# Altium PCB PCB.PcbDoc
Units mm, origin at the board's own origin, x right, y up, seen from the top; angles counter-clockwise.
Board outline 44 x 76 mm, 2 copper layers (Top Layer, Bottom Layer); 18 components, 26 nets, 115 pads, 20 vias.
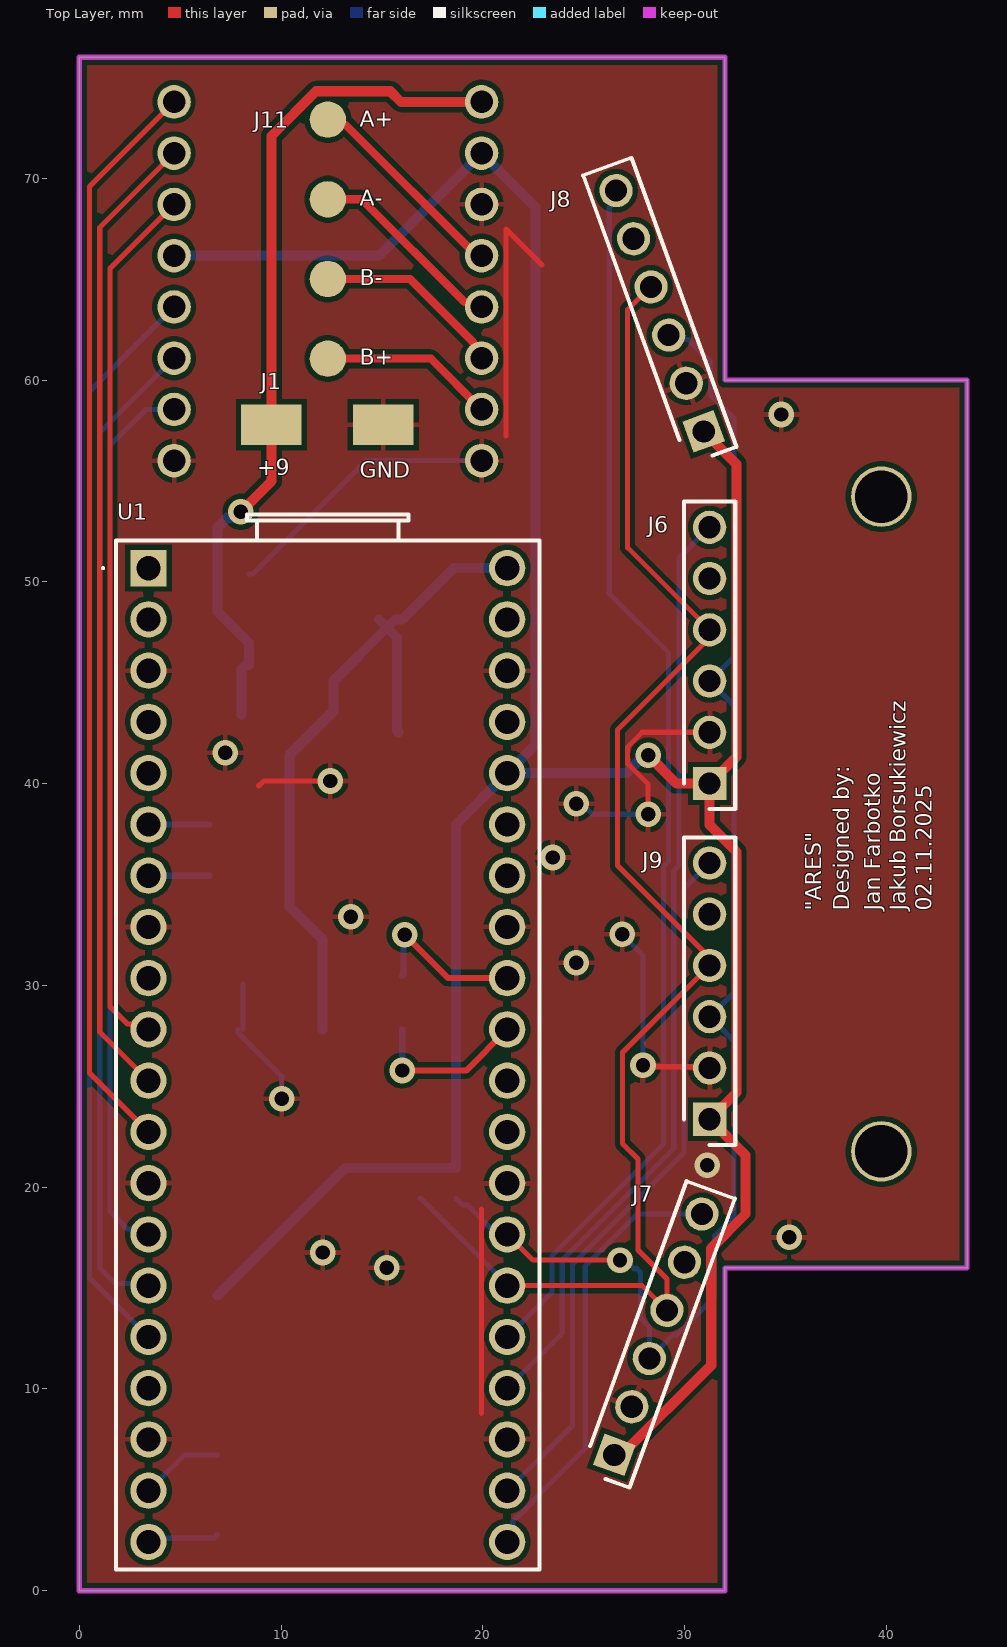
[diagram p0: Top Layer view]
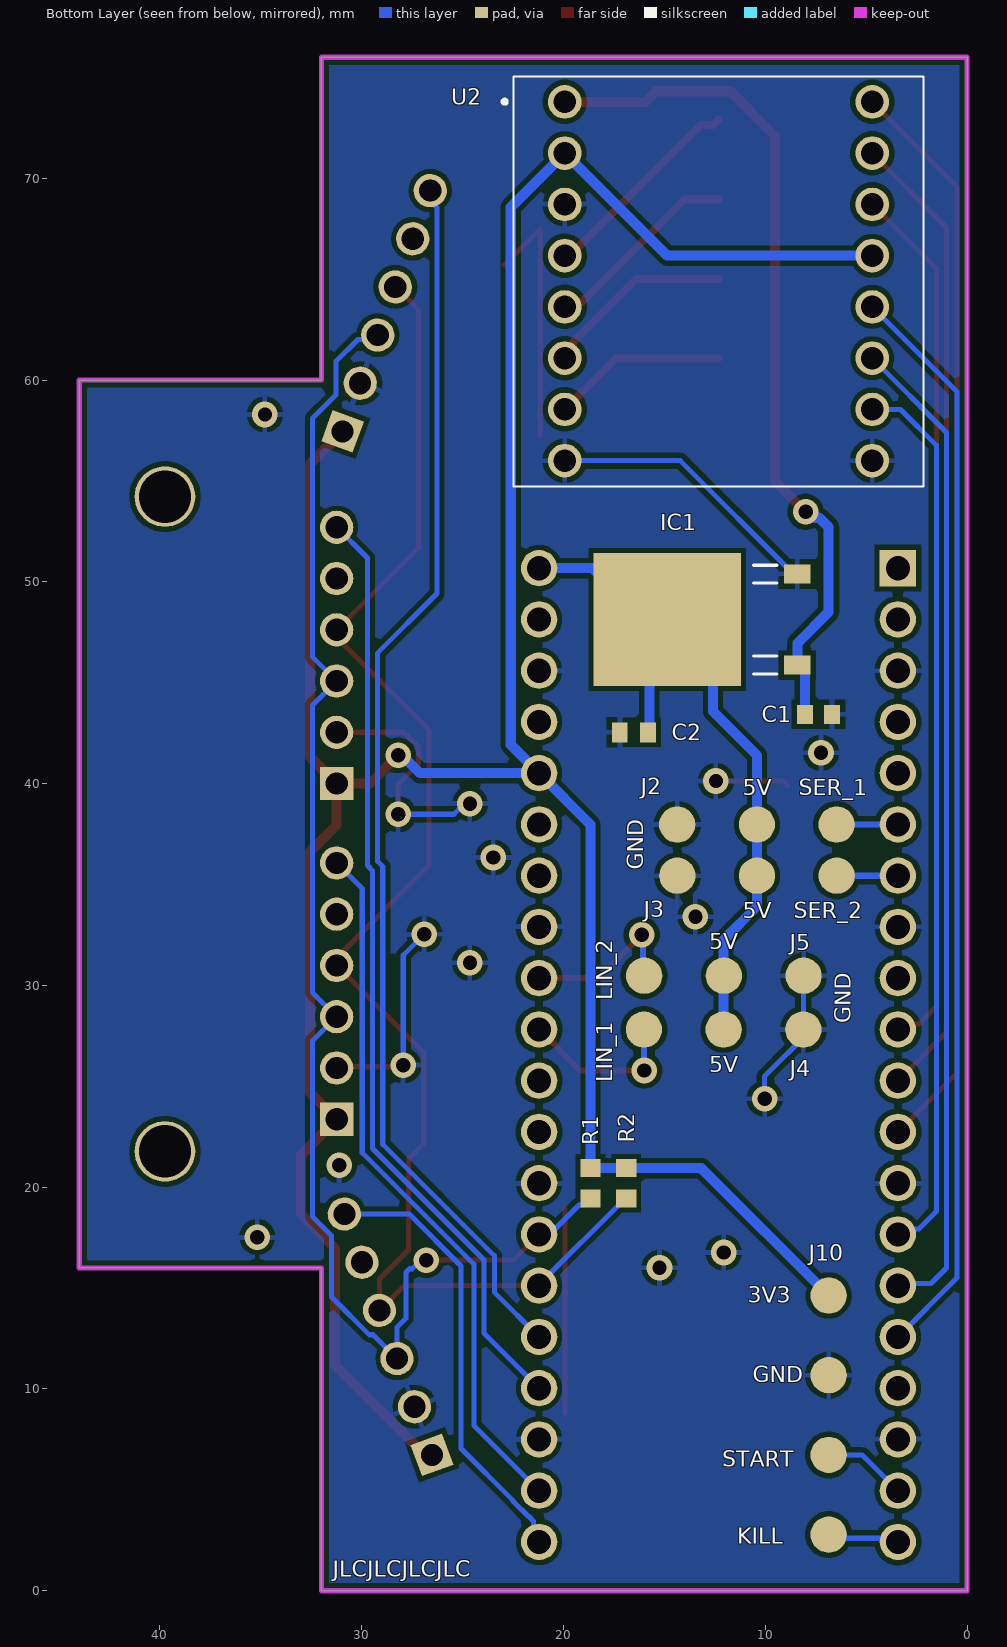
[diagram p1: Bottom Layer view, seen from below]
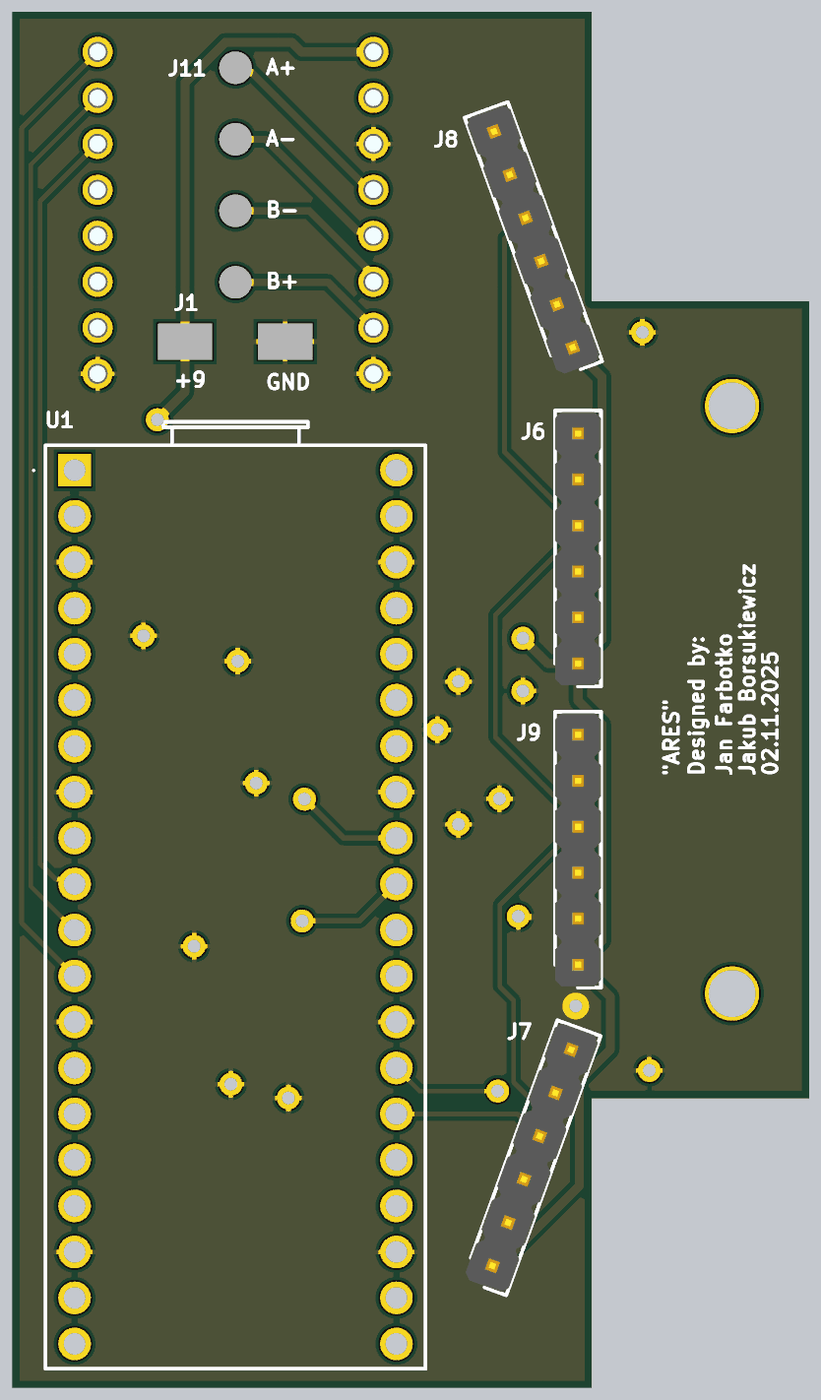
[diagram p2: 3D render of the assembled board from above, using the file's embedded part models]
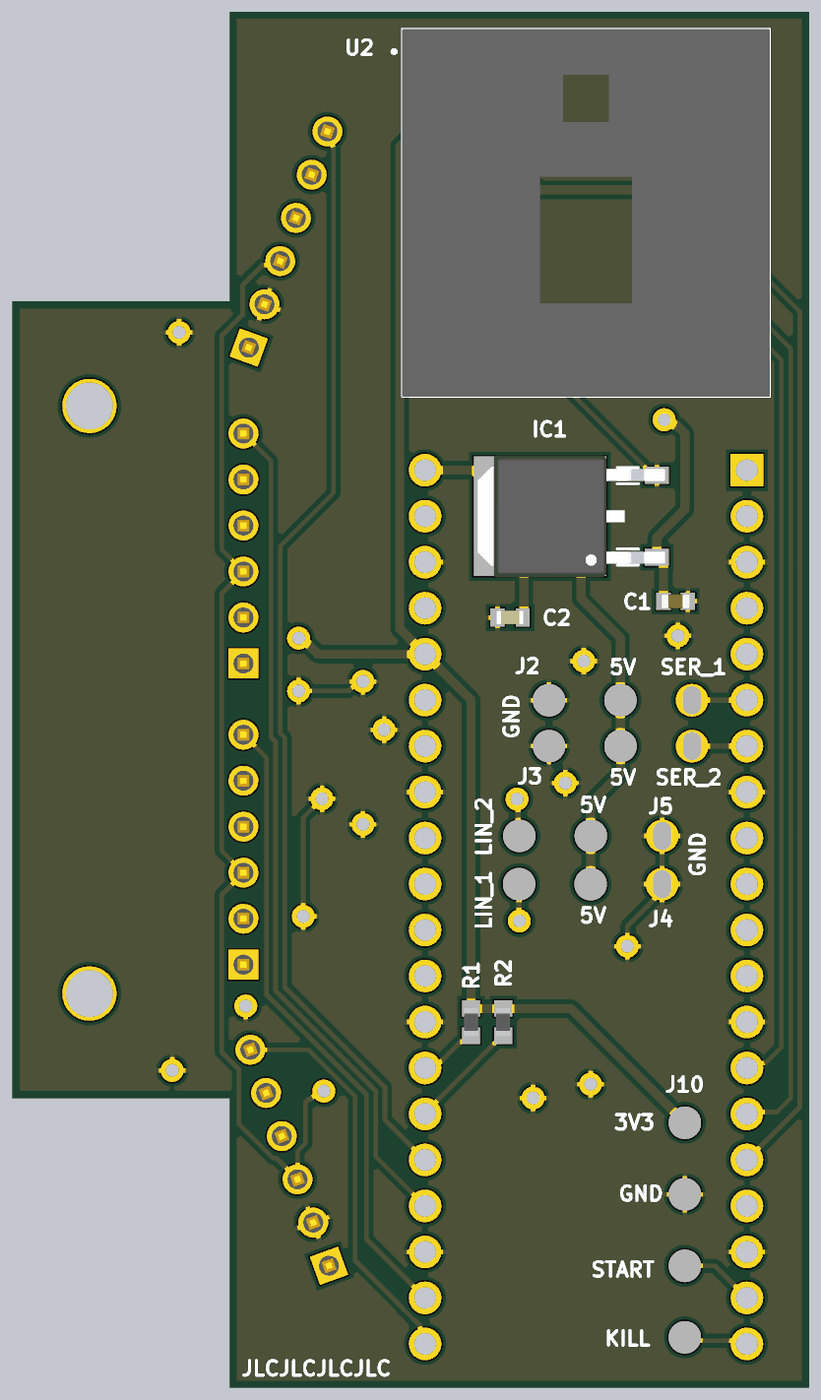
[diagram p3: 3D render of the assembled board from below, using the file's embedded part models]

## Layer stack, top to bottom
Top Solder: solder mask 0.0102, Solder Resist, Dk 3.5
Top Layer: signal copper 0.0356
Dielectric 1: dielectric 0.32, FR-4, Dk 4.8
Bottom Layer: signal copper 0.0356
Bottom Solder: solder mask 0.0102, Solder Resist, Dk 3.5

## Board outline
0,0 0,76 32,76 32,60 44,60 44,16 32,16 32,0

## Design rules (kind name [scope] priority, off if disabled: settings)
Clearance [All] p1: gap=0.254 ignorepadtopadclearanceinfootprint=FALSE
HoleSize [All] p1: absolutevalues=TRUE maxlimit=4 minlimit=0.025 maxpercent=80.000 minpercent=20.000
PolygonConnect [All] p1: connectstyle=Relief reliefconductorwidth=0.254 reliefentries=4 polygonreliefangle="90 Angle" airgapwidth=0.254
RoutingVias [All] p1: holewidth=0.711 width=1.27 viastyle="Through Hole" minholewidth=0.711 minwidth=1.27 maxholewidth=0.711 maxwidth=1.27
SolderMaskExpansion [All] p1: expansion=0.102 istentingtop=FALSE
SupplyNets "Schematic Supply Nets_3" [InNet('GND')] p1: voltage=0.000
SupplyNets "Schematic Supply Nets_2" [InNet('5V')] p2: voltage=0.000
SupplyNets "Schematic Supply Nets_1" [InNet('3V3')] p3: voltage=0.000
SupplyNets "Schematic Supply Nets" [InNet('9V')] p4: voltage=0.000
Width [All] p1: maxlimit=0.5 minlimit=0.254 preferedwidth=0.4 minimp=50.000000 maximp=50.000000 favimp=50.000000
29 further rules are at their usual default settings.

## Classes and differential pairs
component class U_Starter: J10
component class U_IR_Sensor_Block: J6 J7 J8 J9 R1 R2
component class U_Serwo: J2 J3
component class U_Raspberry_main: C1 C2 IC1 J1 U1
component class U_motor_driver: J11 U2
component class U_Line_Sensor: J4 J5

## Components (designator, comment, footprint, x,y, rotation, side; value= is the part's Value field where it differs from the comment)
C1 "330nF" CAPC1608X87N 7.366,43.434 r180 bottom
C2 "100nF" CAPC1608X90N 16.51,42.545 r0 bottom
IC1 "L78M05CDT" TO225P972X240-3N 14.707,48.133 r90 bottom
J1 "M22-2510205" "PCB 2 pin pads" 9.525,57.785 r0 top
J2 "TSW-103-07-T-S" "PCB 3 PIN PADS" 6.464,37.973 r0 bottom
J3 "TSW-103-07-T-S" "PCB 3 PIN PADS" 6.461,35.437 r0 bottom
J4 "TSW-103-07-T-S" "PCB 3 PIN PADS" 8.115,27.813 r0 bottom
J5 "TSW-103-07-T-S" "PCB 3 PIN PADS" 8.102,30.48 r0 bottom
J6 "240-004" HDRV6W64P0X254_1X6_1524X254X909P 31.242,40.005 r270 top
J7 "240-004" HDRV6W64P0X254_1X6_1524X254X909P 26.517,6.735 r250 top
J8 "240-004" HDRV6W64P0X254_1X6_1524X254X909P 30.947,57.456 r290 top
J9 "240-004" HDRV6W64P0X254_1X6_1524X254X909P 31.242,23.368 r270 top
J10 "SS-104-G-22" "PCB 4 PIN PADS" 6.858,2.781 r90 bottom
J11 "SS-104-G-22" "PCB 4 PIN PADS" 12.319,72.911 r270 top
R1 "4.7k" RESC1608X55N 18.669,20.193 r90 bottom
R2 "4.7k" RESC1608X55N 16.891,20.193 r90 bottom
U1 "RASPBERRY_PI_PICO_2_WH" RASPBERRYPIPICO2WH 3.429,50.68 r0 top
U2 "ROB-14450" ROB14450 12.319,64.897 r270 bottom

## Footprints (in the part's own frame and the unit in brackets; to place one, negate y for a bottom-side part, rotate by r counter-clockwise, add the part's x,y. Pads: shape width x height; smd on the part's side, far side on the other; paste and mask are expansions set on the pad)
CAPC1608X87N [mm]
  rect 0.8x0.94 smd: 1(-0.67,0) 2(0.67,0)
  body extent -0.8,-0.4 0.8,0.4, height 0.87
CAPC1608X90N [mm]
  rect 0.78x0.99 smd: 1(-0.7,0) 2(0.7,0)
  body extent -0.76,-0.38 0.76,0.38, height 0.91
HDRV6W64P0X254_1X6_1524X254X909P [mm]
  rect 1.65x1.65 hole 1.1: 1(0,0)
  round 1.65 hole 1.1: 2(-2.54,0) 3(-5.08,0) 4(-7.62,0) 5(-10.16,0) 6(-12.7,0)
  silkscreen extent -13.97,-1.27 1.27,1.27, body extent -13.9,-1.27 1.2,1.27, height 8.85
"PCB 2 pin pads" [mm]
  rect 3x2 smd: 1(0,0) 2(5.54,0)
"PCB 3 PIN PADS" [mm]
  round 1.8 smd paste-2539.97: 1(0,0)
  round 1.8 smd: 2(3.95,0) 3(7.9,0)
"PCB 4 PIN PADS" [mm]
  round 1.8 smd: 1(0,0) 2(3.95,0) 3(7.9,0) 4(11.85,0)
RASPBERRYPIPICO2WH [mm]
  rect 1.8x1.8 hole 1.2: 1(0,0)
  round 1.8 hole 1.2: 2(0,-2.54) 3(0,-5.08) 4(0,-7.62) 5(0,-10.16) 6(0,-12.7) 7(0,-15.24) 8(0,-17.78) 9(0,-20.32) 10(0,-22.86) 11(0,-25.4) 12(0,-27.94) 13(0,-30.48) 14(0,-33.02) 15(0,-35.56) 16(0,-38.1) 17(0,-40.64) 18(0,-43.18) 19(0,-45.72) 20(0,-48.26) 21(17.78,-48.26) 22(17.78,-45.72) 23(17.78,-43.18) 24(17.78,-40.64) 25(17.78,-38.1) 26(17.78,-35.56) 27(17.78,-33.02) 28(17.78,-30.48) 29(17.78,-27.94) 30(17.78,-25.4) 31(17.78,-22.86) 32(17.78,-20.32) 33(17.78,-17.78) 34(17.78,-15.24) 35(17.78,-12.7) 36(17.78,-10.16) 37(17.78,-7.62) 38(17.78,-5.08) 39(17.78,-2.54) 40(17.78,0)
  silkscreen extent -2.3,-49.63 19.39,2.67
RESC1608X55N [mm]
  rect 0.9x1 smd: 1(-0.75,0) 2(0.75,0)
  body extent -0.77,-0.4 0.78,0.4, height 0.45
ROB14450 [mm]
  round 1.665 hole 1.11: 1(-8.89,-7.62) 2(-6.35,-7.62) 3(-3.81,-7.62) 4(-1.27,-7.62) 5(1.27,-7.62) 6(3.81,-7.62) 7(6.35,-7.62) 8(8.89,-7.62) 9(-8.89,7.62) 10(-6.35,7.62) 11(-3.81,7.62) 12(-1.27,7.62) 13(1.27,7.62) 14(3.81,7.62) 15(6.35,7.62) 16(8.89,7.62)
  silkscreen extent -10.16,-10.7 10.16,10.16, body extent -10.16,-10.16 10.16,10.16, height 5.1
TO225P972X240-3N [mil]
  rect 37x52 smd: 1(-89,-248) 3(89,-248)
  rect 260x288 smd: 2(0,6)
  silkscreen extent -106,-208 106,-162, body extent -132,-265 132,142, height 99

## Part data
C1: library part 0603X334K250CT, "Capacitor", Manufacturer_Name=PSA, Datasheet Link=https://datasheet.lcsc.com/szlcsc/Huaxin-S-T-0603X334K250CT_C237211.pdf, Height=0.87mm, Manufacturer_Part_Number=0603X334K250CT
C2: library part 06031C104MAT2A, "Capacitor", Manufacturer_Name="Kyocera AVX", Mouser Part Number=581-06031C104MAT2A, Datasheet Link=https://componentsearchengine.com/Datasheets/1/06031A100FAT2A.pdf, Height=0.9mm, Manufacturer_Part_Number=06031C104MAT2A, Mouser Price/Stock=https://www.mouser.co.uk/ProductDetail/KYOCERA-AVX/06031C104MAT2A?qs=%252BdQmOuGyFcGxIE8rM3npkw%3D%3D
IC1: "Integrated Circuit", Manufacturer_Name=STMicroelectronics, Mouser Part Number=511-L78M05CDT, Datasheet Link=http://componentsearchengine.com/Datasheets/1/L78M05CDT.pdf, Manufacturer_Part_Number=L78M05CDT, Mouser Price/Stock=https://www.mouser.co.uk/ProductDetail/STMicroelectronics/L78M05CDT?qs=EYQuxaDwR79rnNxSL0UEZA%3D%3D
J1: "Connector", Manufacturer_Name=Harwin, Mouser Part Number=855-M22-2510205, Datasheet Link=https://content.harwin.com/m/d9a5a31e6cbac1ad/original/DRG-00499-Technical-Drawing-Datasheet-M22-251-pdf.pdf, Height=5.25mm, Manufacturer_Part_Number=M22-2510205, Mouser Price/Stock=https://www.mouser.co.uk/ProductDetail/Harwin/M22-2510205?qs=vF78I%252BjhbY%2FHssMovH2Mxg%3D%3D
J2 J3 J4 J5: "Connector", Manufacturer_Name=SAMTEC, Mouser Part Number=200-TSW10307TS, Arrow Part Number=TSW-103-07-T-S, Arrow Price/Stock=https://www.arrow.com/en/products/tsw-103-07-t-s/samtec?region=nac, Datasheet Link=http://suddendocs.samtec.com/prints/tsw-xxx-xx-xxx-x-xx-xxx-mkt.pdf, Manufacturer_Part_Number=TSW-103-07-T-S, Mouser Price/Stock=https://www.mouser.co.uk/ProductDetail/Samtec/TSW-103-07-T-S?qs=hzq9O0YpnZs1xDByQQIs%2FQ%3D%3D
J6 J7 J8 J9: "Connector", Manufacturer_Name=Digilent, Arrow Part Number=240-004, Arrow Price/Stock=https://www.arrow.com/en/products/240-004/digilent?utm_currency=USD&region=nac, Datasheet Link=https://digilent.com/reference/_media/reference/test-and-measurement/6-pin-header-gender-changer/163-068-2.pdf, Height=9.09mm, Manufacturer_Part_Number=240-004
J10 J11: "Connector", Manufacturer_Name=SAMTEC, Datasheet Link=http://suddendocs.samtec.com/prints/sx-1xx-xx-xx-x-x-mkt.pdf, Height=4.44mm, Manufacturer_Part_Number=SS-104-G-22
R1 R2: library part RMCF0603FT4K70, "Resistor", Manufacturer_Name="Stackpole Electronics", Mouser Part Number=708-RMCF0603FT4K70, Arrow Part Number=RMCF0603FT4K70, Arrow Price/Stock=https://www.arrow.com/en/products/rmcf0603ft4k70/stackpole-electronics?utm_currency=USD&region=nac, Datasheet Link=https://www.seielect.com/Catalog/SEI-RMCF_RMCP.pdf, Height=0.55mm, Manufacturer_Part_Number=RMCF0603FT4K70, Mouser Price/Stock=https://www.mouser.co.uk/ProductDetail/SEI-Stackpole/RMCF0603FT4K70?qs=FESYatJ8odI8oUfeKfwCJw%3D%3D
U1: "Undefined or Miscellaneous", Manufacturer_Name=RASPBERRY-PI, Manufacturer_Part_Number="RASPBERRY PI PICO 2 WH", Datasheet Link=https://datasheets.raspberrypi.com/pico/pico-2-product-brief.pdf, Height=5mm
U2: "Undefined or Miscellaneous", Manufacturer_Name=SparkFun, Mouser Part Number=474-ROB-14450, Arrow Part Number=ROB-14450, Arrow Price/Stock=https://www.arrow.com/en/products/rob-14450/sparkfun-electronics?region=nac, Datasheet Link=https://www.sparkfun.com/products/14450, Height=5mm, Manufacturer_Part_Number=ROB-14450, Mouser Price/Stock=https://www.mouser.co.uk/ProductDetail/SparkFun/ROB-14450?qs=wd5RIQLrsJhQdlH%2FW5H2aQ%3D%3D

## Free pads (board coordinates)
  round 3 hole 2.6: 2(39.751,21.771) 2(39.751,54.229)

## Via types
v1: diameter 1.27, hole 0.711, Top Layer to Bottom Layer, 20 vias

## Nets (pads, with @x,y where several pads share a name; then routed paths per layer and width w, separated by ;. In a path a pad name is that pad's centre, name@x,y a point inside that pad or via, vN(x,y) a via of type N, cw(c..) or ccw(c..) an arc to the next point about the centre after c; other vN are vias at no path point)
3V3: J6.1 J7.1 J8.1 J9.1 J10.4 R1.2 R2.2 U1.36 U2.2 U2.12 | length 152.5
  Top Layer w0.5: J7.1 26.879,6.735 31.321,11.177 31.321,16.97 33.02,18.669 33.02,21.59 J9.1 32.571,24.697 32.571,36.618 31.242,37.947 J6.1 ; v1(28.194,41.402) 29.591,40.005 J6.1 ; J8.1 32.571,55.833 32.571,41.334 J6.1
  Bottom Layer w0.5: U2.12 14.859,66.167 U2.2 22.613,68.573 22.613,41.924 U1.36 ; J10.4 13.17,20.943 R2.2 R1.2 18.669,37.98 U1.36 ; v1(28.194,41.402) 27.999,41.402 27.117,40.52 U1.36
5V: C2.1 IC1.2 J2.2 J3.2 J4.2 J5.2 U1.40 | length 35.8
  Bottom Layer w0.5: J3.2 10.41,33.913 12.065,32.258 J4.2 ; J3.2@10.414,35.44 J2.2 10.414,41.402 12.594,43.582 12.594,45.081 IC1.2@15.253,47.739 ; IC1.2 IC1.2@15.253,47.739 ; C2.1 15.748,42.607 15.748,47.244 IC1.2@15.253,47.739 ; U1.40 18.549,50.68 16.002,48.133 15.646,48.133 IC1.2@15.253,47.739
9V: C1.1 IC1.1 J1.1 U2.1 | length 42.4
  Top Layer w0.5: v1(8.001,53.467) 9.525,54.991 J1.1 9.525,72.103 11.737,74.315 15.417,74.315 15.945,73.787 U2.1
  Bottom Layer w0.5: v1(8.001,53.467) 7.793,53.467 7.504,53.178 7.331,53.178 6.858,52.705 6.858,48.514 8.407,46.965 IC1.1 8.256,45.872 8.036,45.652 C1.1
A+: J11.1 U2.4 | length 10.4
  Top Layer w0.4: J11.1 12.587,72.643 13.209,72.643 19.685,66.167 U2.4
A-: J11.2 U2.5 | length 9.8
  Top Layer w0.4: J11.2 13.992,68.961 19.084,63.869 19.697,63.869 U2.5
B+: J11.4 U2.7 | length 8.7
  Top Layer w0.4: J11.4 17.425,61.061 U2.7
B-: J11.3 U2.6 | length 9.5
  Top Layer w0.4: J11.3 16.396,65.011 19.517,61.89 19.517,61.852 19.939,61.429 U2.6
DRIVER_A1_IN: U1.10 U2.11 | length 43.2
  Top Layer w0.254: U1.10@3.175,27.686 2.774,28.087 2.393,28.087 1.524,28.956 1.524,65.532 U2.11
DRIVER_A2_IN: U1.11 U2.10 | length 48.5
  Top Layer w0.254: U1.11 1.016,27.693 1.016,67.564 U2.10
DRIVER_B1_IN: U1.16 U2.13 | length 54
  Bottom Layer w0.254: U1.16 0.508,15.501 0.508,59.436 U2.13
DRIVER_B2_IN: U1.15 U2.14 | length 49.4
  Bottom Layer w0.254: U1.15 3.32,15.229 1.789,15.229 1.016,16.002 1.016,57.404 U2.14
DRIVER_PWMA_IN: U1.12 U2.9 | length 54
  Top Layer w0.254: U1.12 0.508,25.661 0.508,69.596 U2.9
DRIVER_PWMB_IN: U1.14 U2.15 | length 44.3
  Bottom Layer w0.254: U1.14 3.162,17.927 2.393,17.927 1.524,18.796 1.524,56.769 3.302,58.547 U2.15
GND: C1.2 C2.2 IC1.3 J1.2 J2.3 J3.3 J4.1 J5.1 J6.2 J7.2 J8.2 J9.2 J10.3 U1.3 U1.8 U1.13 U1.18 U1.23 U1.28 U1.33 U1.38 U2.3 U2.8 U2.16 | length 69.9
  Top Layer w0.254: U1.3@3.429,45.47 U1.3 ; v1(7.239,41.529) v1@7.239,41.66 ; 8.89,39.878 9.144,40.132 v1(12.446,40.132) ; v1@13.462,33.337 v1(13.462,33.401) ; 19.928,8.781 19.928,18.919 ; 21.153,57.221 21.153,67.493 22.939,65.707 ; v1(27.94,26.035) 28.003,25.971 31.178,25.971 J9.2 ; v1(28.194,38.481) 28.194,39.965 27.178,40.981 27.178,41.823 27.9,42.545 J6.2
  Bottom Layer w0.254: U2.16 U2.16@4.96,55.746 ; J4.1@7.861,27.813 7.861,27.673 10.033,25.501 v1(10.033,24.384) ; J4.1 J5.1@8.115,30.065 ; IC1.3 8.598,50.394 14.211,56.007 U2.8 ; v1(24.638,39.01) 24.913,39.01 25.442,38.481 v1(28.194,38.481) ; v1(26.903,32.533) 27.94,31.496 v1(27.94,26.035)
  other v1: 15.24,16.002 12.065,16.764 35.179,17.526 31.115,21.082 24.638,31.115 23.474,36.343 34.798,58.293
IR_XSHUT1: J7.6 U1.21 | length 22.1
  Bottom Layer w0.254: U1.21 21.483,2.694 21.483,3.449 21.713,3.679 21.74,3.679 22.49,4.429 22.49,4.456 25.079,7.045 25.079,16.097 27.651,18.669 J7.6
IR_XSHUT2: J9.6 U1.22 | length 35.3
  Bottom Layer w0.254: U1.22 24.444,8.195 24.444,16.181 29.972,21.709 29.972,34.798 J9.6
IR_XSHUT3: J6.6 U1.24 | length 46.8
  Bottom Layer w0.254: U1.24 23.936,12.767 23.936,16.391 29.464,21.919 29.464,35.689 29.718,35.943 29.718,51.181 J6.6
IR_XSHUT4: J8.6 U1.25 | length 61.5
  Bottom Layer w0.254: U1.25 23.428,14.799 23.428,16.602 28.956,22.13 28.956,35.899 29.21,36.153 29.21,46.482 26.267,49.425 26.267,68.544 26.337,68.614 26.337,69.123 J8.6
Kill: J10.1 U1.20 | length 3.6
  Bottom Layer w0.254: U1.20 3.61,2.601 6.677,2.601 J10.1
LINE_OUT1: J4.3 U1.31 | length 8.1
  Top Layer w0.3: v1(16.002,25.781) 19.17,25.781 U1.31
  Bottom Layer w0.3: v1(16.002,25.781) 16.008,25.787 16.008,27.807 J4.3
LINE_OUT2: J5.3 U1.32 | length 8.1
  Top Layer w0.3: v1(16.129,32.512) 18.281,30.36 U1.32
  Bottom Layer w0.3: J5.3 16.066,30.543 16.066,32.448 v1(16.129,32.512)
RPI_SERWO_1: J2.1 U1.6 | length 3
  Bottom Layer w0.3: U1.6 J2.1@6.457,37.98
RPI_SERWO_2: J3.1 U1.7 | length 3
  Bottom Layer w0.3: U1.7@3.433,35.437 J3.1
SCL0: J6.3 J7.3 J8.3 J9.3 R1.1 U1.27 | length 71.5
  Top Layer w0.254: U1.27 22.486,16.383 v1(26.801,16.383)
  Bottom Layer w0.254: R1.1 18.992,19.12 19.234,19.12 20.398,17.956 20.913,17.956 U1.27 ; v1(26.801,16.383) 27.076,16.383 27.502,15.958 27.633,15.958 27.813,15.778 27.813,13.5 28.255,13.059 J7.3 29.436,12.689 29.623,12.689 31.492,14.558 31.492,17.594 32.448,18.55 32.448,27.242 J9.3 32.448,29.654 32.448,43.879 J6.3 32.448,46.291 32.448,58.103 31.285,59.266 31.285,60.917 30.19,62.012 29.428,62.012 J8.3
SDA0: J6.4 J7.4 J8.4 J9.4 R2.1 U1.26 | length 74
  Top Layer w0.254: U1.26 27.899,15.12 J7.4 29.124,15.445 27.686,16.883 27.686,21.395 26.924,22.157 26.924,26.67 J9.4 31.242,31.366 30.834,31.774 30.834,31.777 26.67,35.941 26.67,42.672 30.834,46.836 30.834,46.839 31.242,47.247 J6.4 27.178,51.689 27.178,63.5 28.295,64.617 J8.4
  Bottom Layer w0.254: R2.1 16.941,19.443 21.209,15.175 U1.26
Start: J10.2 U1.19 | length 4.2
  Bottom Layer w0.254: U1.19 5.2,6.731 J10.2
pads on no net: J6.5 J7.5 J8.5 J9.5 U1.1 U1.2 U1.4 U1.5 U1.9 U1.17 U1.29 U1.30 U1.34 U1.35 U1.37 U1.39

## Polygon pours and split planes (outlines as drawn)
GND on Top Layer "NONET_L-01_P-001" (solid, remove dead copper, pour order 0): 0,76.073 0.127,75.946 31.877,75.946 31.877,60.071 32.004,59.944 44.069,59.944 44.069,16.129 43.942,16.002 32.004,16.002 32.004,0.127 31.877,0 0,0
GND on Bottom Layer "NONET_L-01_P-001" (solid, remove dead copper, pour order 1): 0,76.073 31.75,76.073 32.004,75.819 32.004,60.071 43.942,60.071 44.069,59.944 43.815,59.69 43.815,16.129 32.131,16.129 31.877,15.875 31.877,0 0,0

## Keep-outs
Keep-Out Layer:
  the board outline again, w0.254

## Silkscreen, mask and mechanical layers (free items; w line width, h text height)
Top Overlay:
  text "A+" at 13.894,72.568 h0.8
  text "A-" at 13.894,68.631 h0.8
  text "B-" at 13.894,64.694 h0.8
  text "B+" at 13.894,60.757 h0.8
  text "+9" at 8.814,55.296 h0.8
  text "GND" at 13.894,55.169 h0.8
  text "\"ARES\"" at 36.779,33.706 h0.8 r90
  text "Designed by:" at 38.163,33.706 h0.8 r90
  text "Jan Farbotko" at 39.7,33.706 h0.8 r90
  text "Jakub Borsukiewicz" at 40.97,33.706 h0.8 r90
  text "02.11.2025" at 42.24,33.706 h0.8 r90
Bottom Overlay:
  text "SER_1" at 8.331,39.427 h0.8
  text "5V" at 11.125,39.421 h0.8
  text "GND" at 16.053,35.738 h0.8 r270
  text "SER_2" at 8.598,33.331 h0.8
  text "5V" at 11.125,33.325 h0.8
  text "5V" at 12.776,31.801 h0.8
  text "LIN_2" at 17.583,29.261 h0.8 r270
  text "GND" at 5.766,28.118 h0.8 r270
  text "5V" at 12.776,25.705 h0.8
  text "LIN_1" at 17.583,25.197 h0.8 r270
  text "3V3" at 10.871,14.275 h0.8
  text "GND" at 10.617,10.338 h0.8
  text "START" at 12.141,6.147 h0.8
  text "KILL" at 11.379,2.337 h0.8
  text "JLCJLCJLCJLC" at 31.445,0.686 h0.8
Mechanical 15:
  lines w0.254: 32.766,16.002 32.766,59.944